# Altium PCB Carte_EV_2018.PcbDoc
Units mm, origin at the board's own origin, x right, y up, seen from the top; angles counter-clockwise.
Board outline 74 x 50 mm, 2 copper layers (Component Side, Bottom Layer), stack 1.731 mm thick; 66 components, 37 nets, 175 pads, 14 vias.
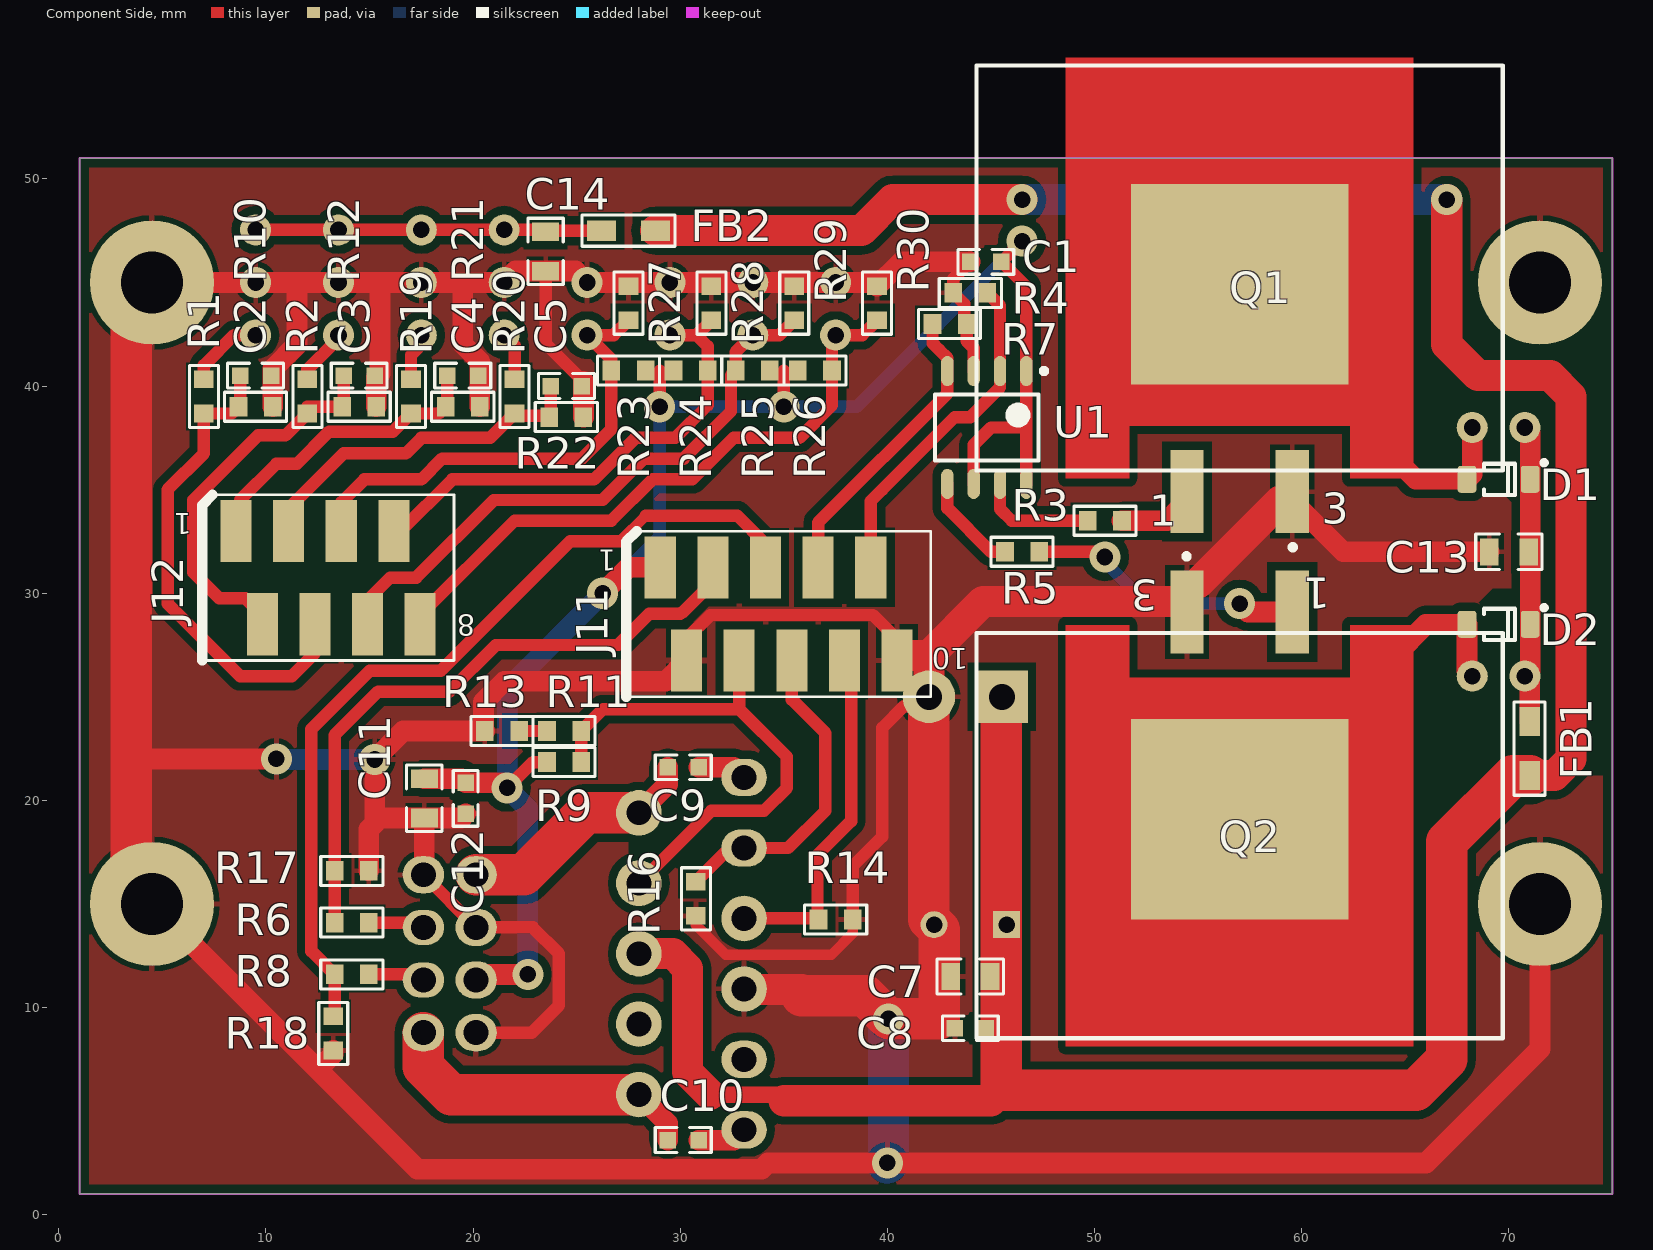
[diagram p0: Component Side view]
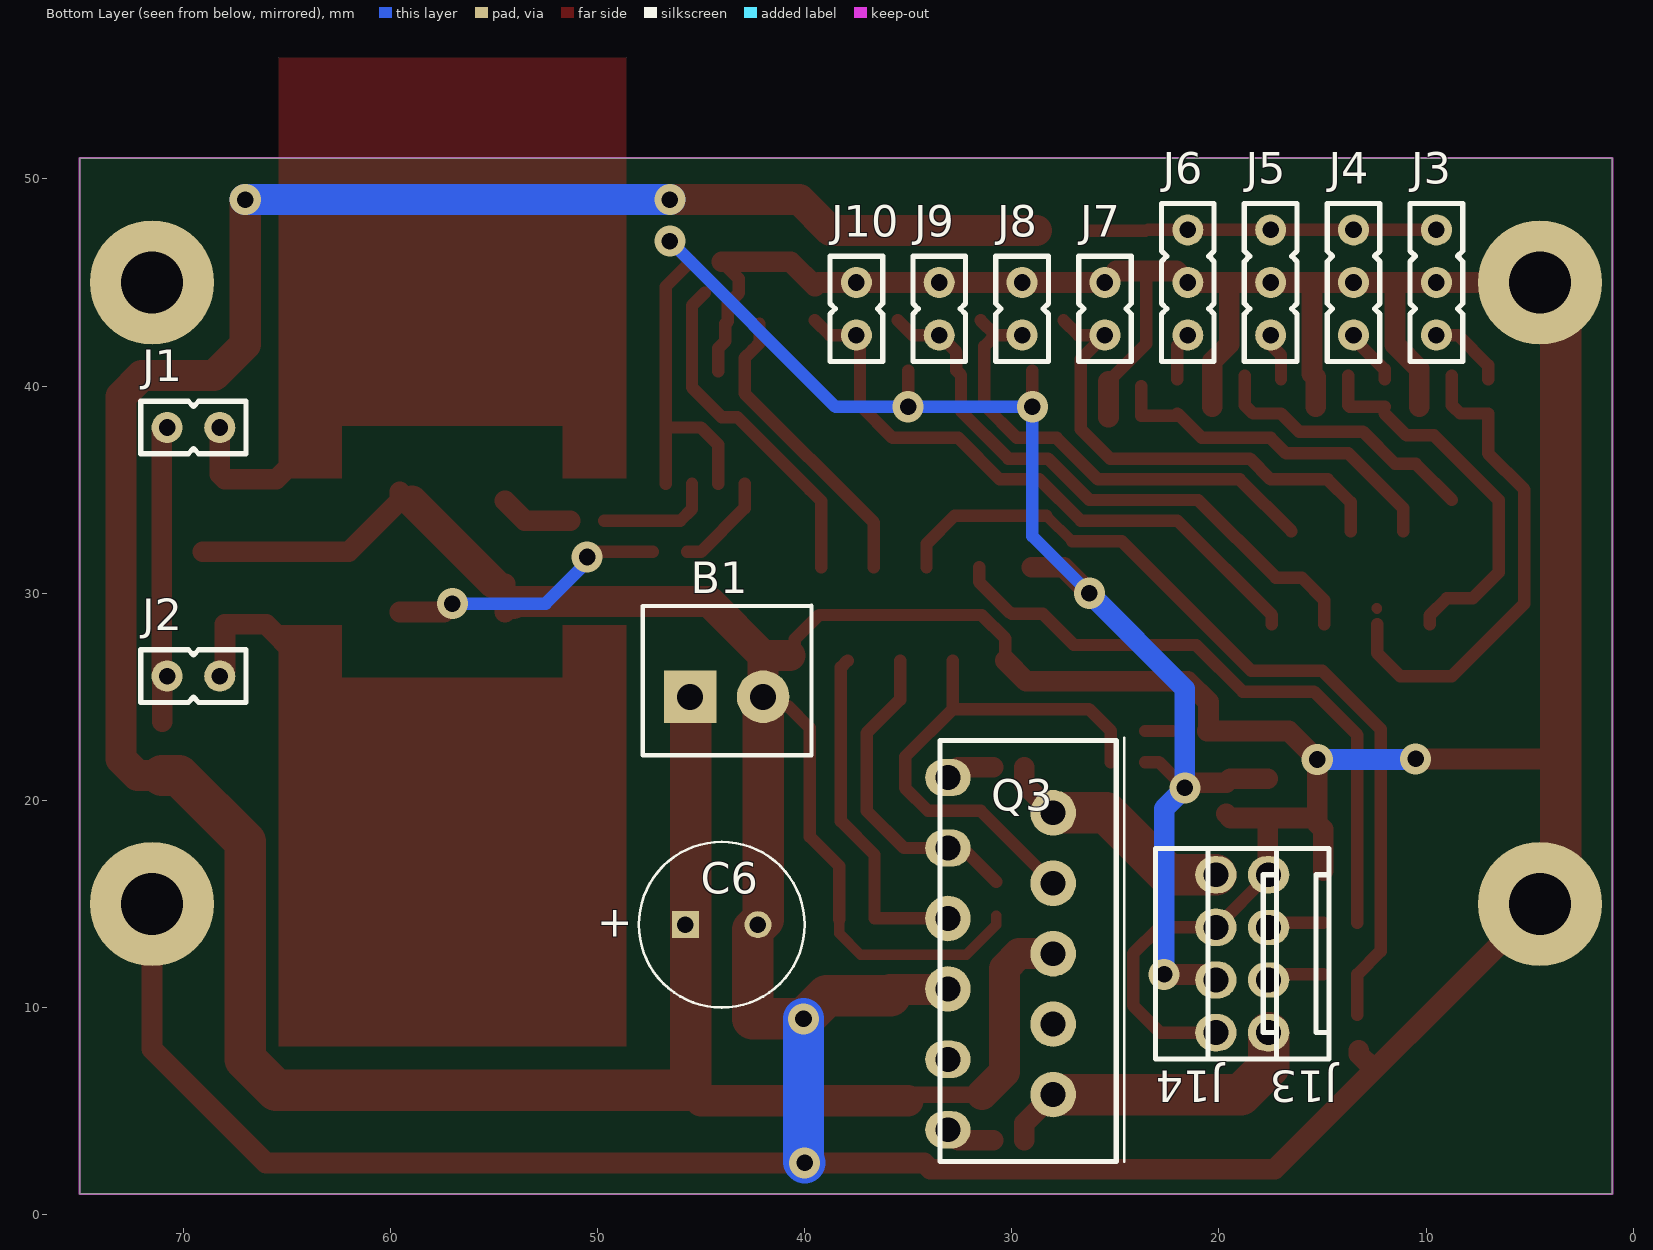
[diagram p1: Bottom Layer view, seen from below]
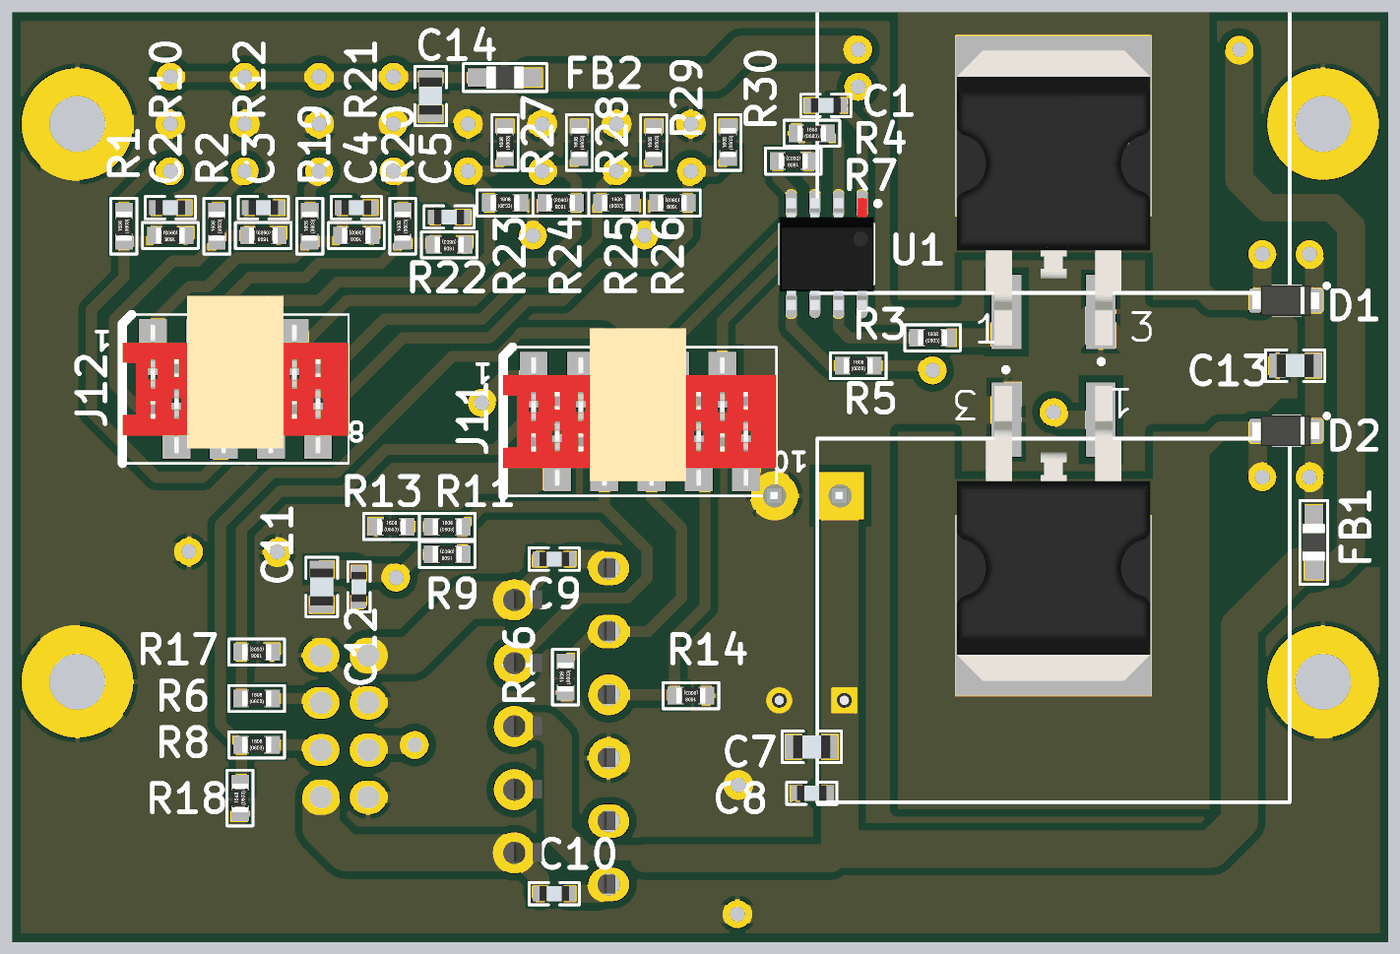
[diagram p2: 3D render of the assembled board from above, using the file's embedded part models]

## Layer stack, top to bottom
Top Solder: solder mask 0.0102, Solder Resist, Dk 3.5
Component Side: signal copper 0.0356
Dielectric 1: core 1.66, FR-4, Dk 4.2
Bottom Layer: signal copper 0.0356
Solder Side: solder mask 0.0102, Solder Resist, Dk 3.5

## Board outline
1,1 75,1 75,51 1,51

## Design rules (kind name [scope] priority, off if disabled: settings)
AssemblyTestPointUsage [All] p1 off:
AssemblyTestpoint [All] p1 off: testpointundercomponent=TRUE minsize=1.016 maxsize=2.54 preferedsize=1.524 minholesize=0 maxholesize=1.016 preferedholesize=0.813 testpointgrid=0.025 usegrid=TRUE gridtolerance=0 allowsidetop=TRUE allowsidebottom=TRUE
Clearance [All] p1: gap=0.4
ComponentClearance [All] p1: gap=0.2 collisioncheckmode=3 verticalgap=1 showdistances=FALSE
DiffPairsRouting [All] p1 off: maxlimit=0.254 minlimit=0.254 mostfreqgap=0.254 toplayer_minwidth=0.381 toplayer_maxwidth=0.381 toplayer_prefwidth=0.381 bottomlayer_minwidth=0.381 bottomlayer_maxwidth=0.381 bottomlayer_prefwidth=0.381 maxuncoupledlength=12.7
FabricationTestPointUsage TestPointUsage [All] p1 off: valid=0 allowmultiple=FALSE
FabricationTestpoint Testpoint [All] p1 off: side=3 testpointundercomponent=TRUE minsize=1.016 maxsize=2.54 preferedsize=1.524 minholesize=0 maxholesize=1.016 preferedholesize=0.813 testpointgrid=0.025 allowsidetop=TRUE allowsidebottom=TRUE usegrid=TRUE gridtolerance=0
FanoutControl Fanout_BGA [IsBGA] p1 off: bgadir=Out bgaviamode=Centered fanoutstyle=Auto fanoutdirection=Alternating viagrid=0.025 // Fanout_BGA (Default Rule)
FanoutControl Fanout_LCC [IsLCC] p2 off: bgadir=Out bgaviamode=Centered fanoutstyle=Auto fanoutdirection=Alternating viagrid=0.025 // Fanout_LCC (Default Rule)
FanoutControl Fanout_SOIC [IsSOIC] p3 off: bgadir=Out bgaviamode=Centered fanoutstyle=Auto fanoutdirection=Alternating viagrid=0.025 // Fanout_SOIC (Default Rule)
FanoutControl Fanout_Small [(CompPinCount < 5)] p4 off: bgadir=Out bgaviamode=Centered fanoutstyle=Auto fanoutdirection=OutThenIn viagrid=0.025 // Fanout_Small (Default Rule)
FanoutControl Fanout_Default [All] p5 off: bgadir=Out bgaviamode=Centered fanoutstyle=Auto fanoutdirection=Alternating viagrid=0.025 // Fanout_Default (Default Rule)
HoleSize [All] p1: absolutevalues=TRUE maxlimit=6 minlimit=0.15 maxpercent=80.000 minpercent=20.000
HoleToHoleClearance [All] p1: gap=0.6 allowstackedmicrovias=TRUE
MinimumSolderMaskSliver [All] p1: minsoldermaskwidth=0.075
MinimumSolderMaskSliver SilkscreenOverComponentPads [All] p2 off: minsoldermaskwidth=0.254
NetAntennae [All] p1 off: netantennaetolerance=0
PlaneClearance [All] p1: clearance=0.5
PlaneConnect [All] p1: planeconnectstyle=Relief reliefexpansion=0.4 reliefentries=4 reliefconductorwidth=0.3 reliefairgap=0.2
PolygonConnect [All] p1: connectstyle=Relief reliefconductorwidth=0.25 reliefentries=4 polygonreliefangle="90 Angle" airgapwidth=0.254
RoutingVias [All] p1: holewidth=0.8 width=1.5 viastyle="Through Hole" minholewidth=0.2 minwidth=0.6 maxholewidth=0.8 maxwidth=1.5
SilkToSilkClearance [All] p1 off: silktosilkclearance=0.1
SolderMaskExpansion [All] p1: expansion=0.05
Width [All] p1: maxlimit=3 minlimit=0.15 preferedwidth=0.6
12 further rules are at their usual default settings.

## Components (designator, comment, footprint, x,y, rotation, side; value= is the part's Value field where it differs from the comment)
B1 "1776275-2" BORNIER_2V_3.5MM 45.5,25 r180 bottom
C1 "100nF" "WCAP-CSGP_0603, 1.6x0.8x0.8" 44.75,46 r0 top
C2 "100nF" "WCAP-CSGP_0603, 1.6x0.8x0.8" 9.5,40.5 r180 top
C3 "100nF" "WCAP-CSGP_0603, 1.6x0.8x0.8" 14.5,40.5 r180 top
C4 "100nF" "WCAP-CSGP_0603, 1.6x0.8x0.8" 19.5,40.5 r180 top
C5 "100nF" "WCAP-CSGP_0603, 1.6x0.8x0.8" 24.5,40 r180 top
C6 "220 uF" WCAP-ATG8_8x11.5x3.5x0.5 44,14 r0 bottom
C7 "1uF" "WCAP-CSGP_0805, 2x1.25x1.25" 44,11.5 r0 top
C8 "100nF" "WCAP-CSGP_0603, 1.6x0.8x0.8" 44,9 r0 top
C9 "10nF" "WCAP-CSGP_0603, 1.6x0.8x0.8" 30.143,21.6 r180 top
C10 "10nF" "WCAP-CSGP_0603, 1.6x0.8x0.8" 30.143,3.6 r180 top
C11 "1uF" "WCAP-CSGP_0805, 2x1.25x1.25" 17.643,20.1 r90 top
C12 "100nF" "WCAP-CSGP_0603, 1.6x0.8x0.8" 19.643,20.1 r90 top
C13 "1uF" "WCAP-CSGP_0805, 2x1.25x1.25" 70,32 r0 top
C14 "1uF" "WCAP-CSGP_0805, 2x1.25x1.25" 23.5,46.5 r90 top
D1 "RBR3MM40ATFTR" SOD-123FL 69.5,35.5 r0 top
D2 "RBR3MM40ATFTR" SOD-123FL 69.5,28.5 r0 top
FB1 "742792023" "WE-CBF_0805_High Current" 71,22.5 r90 top
FB2 "742792023" "WE-CBF_0805_High Current" 27.5,47.5 r180 top
J1 "22-03-2021" 22-03-2021 69.5,38 r0 bottom
J2 "22-03-2021" 22-03-2021 69.5,26 r0 bottom
J3 "22-03-2031" 22-03-2031 9.5,45 r90 bottom
J4 "22-03-2031" 22-03-2031 13.5,45 r90 bottom
J5 "22-03-2031" 22-03-2031 17.5,45 r90 bottom
J6 "22-03-2031" 22-03-2031 21.5,45 r90 bottom
J7 "22-03-2021" 22-03-2021 25.5,43.73 r270 bottom
J8 "22-03-2021" 22-03-2021 29.5,43.73 r270 bottom
J9 "22-03-2021" 22-03-2021 33.5,43.73 r270 bottom
J10 "22-03-2021" 22-03-2021 37.5,43.73 r270 bottom
J11 "690367281076" 690367281076 34.75,29 r180 top
J12 "690367280876" 690367280876 13,30.75 r180 top
J13 "22-27-2041" 22-27-2041#1 17.603,12.6 r270 bottom
J14 "22-27-2041" 22-27-2041#2 20.143,12.6 r270 bottom
Q1 "IRF1018ESPBF" "D2Pak / AAVID 7109DG" 57,33 r0 top
Q2 "IRF1018ESPBF" "D2Pak / AAVID 7109DG" 57,31 r180 top
Q3 "LMD18200T" LMD18200T 29.143,12.6 r270 bottom
R1 "RC0603FR-07100KL" RESC1608X06N 7,39.5 r90 top
R2 "RC0603FR-07100KL" RESC1608X06N 12,39.5 r90 top
R3 "RC0603FR-0733RL" RESC1608X06N 50.5,33.5 r0 top
R4 "RC0603FR-07100KL" RESC1608X06N 44,44.5 r0 top
R5 "RC0603FR-0733RL" RESC1608X06N 46.5,32 r0 top
R6 "RC0603FR-0733RL" RESC1608X06N 14.143,14.1 r0 top
R7 "RC0603FR-07100KL" RESC1608X06N 43,43 r180 top
R8 "RC0603FR-0733RL" RESC1608X06N 14.143,11.6 r0 top
R9 "RC0603FR-0710KL" RESC1608X06N 24.393,21.85 r180 top
R10 "RC0603FR-0710KL" RESC1608X06N 9.5,39 r180 top
R11 "RC0603FR-0710KL" RESC1608X06N 24.393,23.35 r0 top
R12 "RC0603FR-0710KL" RESC1608X06N 14.5,39 r180 top
R13 "RC0603FR-0710KL" RESC1608X06N 21.393,23.35 r0 top
R14 "RC0603FR-07100KL" RESC1608X06N 37.5,14.25 r180 top
R16 "RC0603FR-0710KL" RESC1608X06N 30.75,15.25 r90 top
R17 "RC0603FR-0710KL" RESC1608X06N 14.143,16.6 r180 top
R18 "RC0603FR-0710KL" RESC1608X06N 13.25,8.75 r90 top
R19 "RC0603FR-07100KL" RESC1608X06N 17,39.5 r90 top
R20 "RC0603FR-07100KL" RESC1608X06N 22,39.5 r90 top
R21 "RC0603FR-0710KL" RESC1608X06N 19.5,39 r180 top
R22 "RC0603FR-0710KL" RESC1608X06N 24.5,38.5 r180 top
R23 "RC0603FR-0710KL" RESC1608X06N 27.5,40.75 r0 top
R24 "RC0603FR-0710KL" RESC1608X06N 30.5,40.75 r180 top
R25 "RC0603FR-0710KL" RESC1608X06N 33.5,40.75 r0 top
R26 "RC0603FR-0710KL" RESC1608X06N 36.5,40.75 r180 top
R27 "RC0603FR-0710KL" RESC1608X06N 27.5,44 r90 top
R28 "RC0603FR-0710KL" RESC1608X06N 31.5,44 r90 top
R29 "RC0603FR-0710KL" RESC1608X06N 35.5,44 r90 top
R30 "RC0603FR-0710KL" RESC1608X06N 39.5,44 r90 top
U1 "PM8834" SOIC127P600X175-8N 44.8,38 r270 top

## Footprints (in the part's own frame and the unit in brackets; to place one, negate y for a bottom-side part, rotate by r counter-clockwise, add the part's x,y. Pads: shape width x height; smd on the part's side, far side on the other; paste and mask are expansions set on the pad)
22-03-2021 [mm]
  round 1.5 hole 0.8: 1(1.27,0) 2(-1.27,0)
  silkscreen extent -2.54,-1.27 2.54,1.27, body extent -2.54,-1.27 2.54,1.27, height 11.6
22-03-2031 [mm]
  round 1.5 hole 0.8: 1(2.54,0) 2(0,0) 3(-2.54,0)
  silkscreen extent -3.81,-1.27 3.81,1.27, body extent -3.81,-1.27 3.81,1.27, height 11.6
22-27-2041#1 [mm]
  oval 1.8x2 hole 1.2: 1(3.81,0) 4(-3.81,0)
  oval 1.7x2 hole 1.2: 2(1.27,0) 3(-1.27,0)
  silkscreen extent -5.08,-2.92 5.08,2.92, body extent -5.08,-2.92 5.08,2.88, height 11.72
22-27-2041#2 [mm]
  oval 1.8x2 hole 1.2: 1(3.81,0) 2(1.27,0) 3(-1.27,0) 4(-3.81,0)
  silkscreen extent -5.08,-2.92 5.08,2.92, body extent -5.08,-2.92 5.08,2.88, height 11.72
690367280876 [mm] "8 pins, SMT, straight, without Latch"
  rect 1.5x3 smd: 1(4.445,-2.25) 2(3.175,2.25) 3(1.905,-2.25) 4(0.635,2.25) 5(-0.635,-2.25) 6(-1.905,2.25) 7(-3.175,-2.25) 8(-4.445,2.25)
  silkscreen extent -6.08,-4 6.08,4, body extent -6.08,-5 6.08,3.5, height 5.75
690367281076 [mm] "10 pins, SMT, straight, without Latch"
  rect 1.5x3 smd: 1(5.715,-2.25) 2(4.445,2.25) 3(3.175,-2.25) 4(1.905,2.25) 5(0.635,-2.25) 6(-0.635,2.25) 7(-1.905,-2.25) 8(-3.175,2.25) 9(-4.445,-2.25) 10(-5.715,2.25)
  silkscreen extent -7.35,-4 7.35,4, body extent -7.35,-5 7.35,3.5, height 5.7
BORNIER_2V_3.5MM [mm]
  rect 2.54x2.54 hole 1.25: 1(-0.025,0)
  round 2.54 hole 1.25: 2(3.5,0)
  silkscreen extent -2.31,-2.82 5.84,4.39, body extent -2.27,-5.08 5.83,5.32, height 21.81
"D2Pak / AAVID 7109DG" [mm] "D2-PAK; 3 Leads (1 Cropped); Body 15.2 (inc. leads) x 10.9 mm (LxW max)"
  rect 1.61x4 smd: 1(-2.54,1.905) 3(2.54,1.905)
  rect 10.49x9.68 smd: 2(0,11.905)
  Component Side region: -5.334,5.08 5.334,5.08 5.334,2.54 8.382,2.54 8.382,22.86 -8.382,22.86 -8.382,2.54 -5.334,2.54
  silkscreen extent -12.7,-1.34 12.7,22.48, body extent -12.7,0.1 12.7,22.48, height 11.43
LMD18200T [mm]
  oval 1.8x2.2 hole 1.2: 1(-8.5,-3.937) 3(-5.1,-3.937) 9(5.1,-3.937) 11(8.5,-3.937)
  round 2.2 hole 1.2: 2(-6.8,1.143) 4(-3.4,1.143) 5(-1.7,-3.937) 6(0,1.143) 7(1.7,-3.937) 8(3.4,1.143) 10(6.8,1.143)
  silkscreen extent -10.41,-4.32 10.03,4.57, body extent -10.33,-4.3 10.07,4.19, height 16.79
RESC1608X06N [mm] "Chip Resistor, 2-Leads, Body 1,6x0,8mm, IPC Medium Density"
  rect 0.85x0.95 smd: 1(-0.825,0) 2(0.825,0)
  silkscreen extent -1.5,-0.7 1.5,0.7, body extent -0.77,-0.42 0.78,0.43, height 0.45
SOD-123FL [mm] "SOD-123FL"
  rrect30% 0.9x1.3 smd: 1(-1.525,0) 2(1.525,0)
  silkscreen extent -0.7,-0.75 2.3,0.9, body extent -1.8,-0.83 1.8,0.82, height 0.95
SOIC127P600X175-8N [mm] "SOIC, 8-Leads, Body 4,90x3,90mm, Pitch 1,27mm, IPC Medium Density"
  oval 1.45x0.6 smd: 1(-2.725,1.905) 2(-2.725,0.635) 3(-2.725,-0.635) 4(-2.725,-1.905) 5(2.725,-1.905) 6(2.725,-0.635) 7(2.725,0.635) 8(2.725,1.905)
  silkscreen extent -2.85,-2.5 1.6,2.88, body extent -3,-2.54 3,2.54, height 1.7
WCAP-ATG8_8x11.5x3.5x0.5 [mm] "Polarized capacitors, Aluminum Electrolytic Capacitors, 2-Leads, Body 8x11.5x3.5x0.5"
  rect 1.3x1.3 hole 0.8: 1(1.75,0)
  round 1.3 hole 0.8: 2(-1.75,0)
  silkscreen extent -4,-4 4,4, body extent -3.99,-4 4,4, height 11.61
"WCAP-CSGP_0603, 1.6x0.8x0.8" [mm] "WCAP-CSGP Ceramic Capacitors, size 0603, body 1.6x0.8x0.8"
  rect 0.8x0.8 smd: 1(-0.75,0) 2(0.75,0)
  silkscreen extent -1.35,-0.6 1.35,0.6, body extent -0.8,-0.4 0.8,0.4, height 0.8
"WCAP-CSGP_0805, 2x1.25x1.25" [mm] "WCAP-CSGP Ceramic Capacitors, size 0805, body 2x1.25x1.25"
  rect 0.9x1.3 smd: 1(-0.95,0) 2(0.95,0)
  silkscreen extent -1.6,-0.85 1.6,0.85, body extent -1,-0.62 1,0.63, height 1.22
"WE-CBF_0805_High Current" [mm] "SMD EMI Suppression Ferrite  Bead, body 2.0mmx1.2mm"
  rect 1.4x1 smd: 1(-1.3,0) 2(1.3,0)
  silkscreen extent -2.25,-0.75 2.25,0.75, body extent -1,-0.6 1,0.6, height 0.93

## Part data
B1: "TERM BLOCK 2POS SIDE ENT 3.5MM"
C1 C2 C3 C4 C5 C8 C12: library part "WCAP-CSGP, 885012206095", "CAP CER 100nF 50V X7R 0603"
C6: library part "WCAP-ATG8, 860010574011", "CAP Alu 220 UF 20% 35 V"
C7 C11 C13 C14: library part "WCAP-CSGP, 885012207103", "CAP CER 1uF 50V X7R 0805"
C9 C10: library part "WCAP-CSGP, 885012206089", "CAP CER 10nF 50V X7R 0603"
D1 D2: "DIODE SCHOTTKY 40V 3A SOD123-FL"
FB1 FB2: library part "WE-CBF, 742792023", "Ferrite Bead 120ohm 0805 max3.0A"
J11: "WR-MM 10p Female SMT Connector with Polarization"
J12: "WR-MM 8p Female SMT Connector with Polarization"
Q1 Q2: "MOSFET N-CH 60V 79A D2PAK"
R1 R2 R4 R7 R14 R19 R20: "RES SMD 100K OHM 1% 1/10W 0603"
R3 R5 R6 R8: "RES SMD 33 OHM 1% 1/10W 0603"
R9 R10 R11 R12 R13 R16 R17 R18 R21 R22 R23 R24 R25 R26 R27 R28 R29 R30: "RES SMD 10K OHM 1% 1/10W 0603"
U1: "IC MOSFET DVR 4A DUAL 8SOIC"

## Free pads (board coordinates)
  round 6 hole 3: 0(4.5,15) 0(4.5,45) 0(71.5,15) 0(71.5,45)

## Via types
v1: diameter 1.5, hole 0.8, Component Side to Bottom Layer, 14 vias

## Nets (pads, with @x,y where several pads share a name; then routed paths per layer and width w, separated by ;. In a path a pad name is that pad's centre, name@x,y a point inside that pad or via, vN(x,y) a via of type N, cw(c..) or ccw(c..) an arc to the next point about the centre after c; other vN are vias at no path point)
5L: C1.2 C11.2 C12.2 J11.1 J14.2 R9.2 R23.2 R24.2 R25.2 R26.2 U1.1 U1.6 U1.8 | length 84.4
  Component Side w0.6: v1(21.643,20.6) 22.893,21.85 R9.2 ; v1(29,39) 29,40.75 ; v1(35,39) 35,40.75 ; U1.6 44.165,37.165 45,38 46.705,38 ; v1(46.5,47) C1.2 46.705,44.795 U1.1 46.705,38 ; U1.8 46.705,38
  Component Side w1: C11.2 19.443,21.05 C12.2 v1@21.393,20.85 ; J14.2@20.413,11.6 v1(22.643,11.6) ; v1(26.25,30) 27.5,31.25 J11.1
  Bottom Layer w0.6: v1(26.25,30) 29,32.75 v1(29,39) v1(35,39) 38.5,39 v1(46.5,47)
  Bottom Layer w1: v1(22.643,11.6) 22.643,19.6 v1(21.643,20.6) 21.643,25.393 v1(26.25,30)
ALIM_C: C14.2 FB2.2 J3.1 J4.1 J5.1 J6.1 | length 16.6
  Component Side w0.6: J3.1 J4.1 J5.1 J6.1 C14.2@23.41,47.54 ; C14.2@23.55,47.5 FB2.2
ALIM_EV: C13.2 D1.2 D2.2 FB1.2 J1.1 J2.1 | length 14.2
  Component Side w1: J2.1 71.025,26.255 D2.2 D1.2 71.025,37.745 J1.1 ; FB1.2 J2.1@71,25.77
GND: B1.2 C1.1 C2.1 C3.1 C4.1 C5.1 C6.2 C7.1 C8.1 C11.1 C12.1 C13.1 C14.1 J3.2 J4.2 J5.2 J6.2 J7.2 J8.2 J9.2 J10.2 J11.2 J11.10 J13.4 J14.1 J14.3 pad.0 Q1.3 Q2.3 Q3.7 R4.1 R7.1 R10.1 R12.1 R13.1 R14.1 R16.1 R17.1 R18.1 R21.1 R22.1 R27.2 R28.2 R29.2 R30.2 U1.3 | length 344.8
  Component Side w0.5: R16.1 30.75,14 32.2,12.55 37.3,12.55 38.325,13.575 R14.1
  Component Side w0.6: J13.4 J14.3 22.873,13.87 24.143,12.6 24.143,10.1 22.833,8.79 J14.1 ; C14.1 23.5,42.05 C5.1@25.325,40.225 ; J11.2 30.305,27.805 31.45,28.95 39.3,28.95 40.465,27.785 J11.10 ; R14.1 38.325,16.825 39.75,18.25 39.75,23.5 40.8,24.55 B1.2@41.505,24.55 ; C1.1 43.175,45.175 R4.1 43.7,43.975 43.7,43.125 R7.1 43.825,42.175 44.165,41.835 U1.3
  Component Side w1: 3.5,22 v1(10.5,22) ; pad.0@4.5,15 17.3,2.2 33.926,2.2 34.226,2.5 v1(40,2.5) 66,2.5 71.5,8 pad.0@71.5,15 ; pad.0@4.5,45 J3.2 J4.2 15.5,45 ; R10.1 10.325,40.825 11.5,42 11.5,45 ; 12.625,7.125 13.25,7.75 R18.1 ; R17.1 14.968,18.6 15.25,18.882 v1(15.25,21.975) 16.625,23.35 R13.1 20.5,23.418 20.5,24.75 21.5,25.75 29.305,25.75 J11.2 ; R12.1 15.325,40.425 15.5,40.6 15.5,45 ; 15.518,19.15 C11.1 ; J13.4@17.643,16.45 C11.1 ; C12.1 19.443,19.15 C11.1 ; R21.1 20.325,41.198 19.5,42.023 19.5,45 ; 24.95,45.55 C14.1 22.05,45.55 J6.2 19.5,45 ; R22.1 C5.1@25.325,40.225 ; J7.2 J8.2 J10.2 R30.2@39.325,45 ; R30.2 40.675,46 C1.1 ; Q2.3@54.055,29.5 Q2.3 54.46,30.46 Q2.3@54.96,30.46 ; Q1.3@58.96,34.46 Q1.3@59.54,34.46 ; Q1.3 Q1.3@59.54,34.46 ; C13.1 62,32 Q1.3@59.54,34.46 ; 15.5,45 J5.2 19.5,45
  Component Side w1.5: Q3.7 33.105,10.875 35.868,10.875 ; J11.10@40.715,27 42,27 ; B1.2@42,25.5 42,27 ; Q2.3@54.055,29.5 53.945,29.61 44.61,29.61 42,27 ; Q2.3@54.96,30.46 Q1.3@58.96,34.46
  Component Side w2: pad.0@3.5,16 3.5,22 3.5,44 pad.0@4.5,45 ; 35.868,10.575 38.925,10.575 v1(40.05,9.45) 42.5,9.45 42.5,13.75 C6.2 42,14.25 B1.2
  Bottom Layer w1: v1(10.5,22) 10.525,21.975 v1(15.25,21.975)
  Bottom Layer w2: v1(40,2.5) 40.05,2.55 v1(40.05,9.45)
LA1: C2.2 J12.4 R1.1 R10.2 | length 23.7
  Component Side w0.5: J12.4@12.365,29.25 J12.4@12.385,29.27
  Component Side w0.6: C2.2 8.75,39.075 R10.2 8.35,38.675 R1.1 7,36.75 5.25,35 5.25,29.5 8.75,26 11.25,26 12.365,27.115 J12.4
LA2: C3.2 J12.2 R2.1 R12.2 | length 18.5
  Component Side w0.6: J12.2 9.825,28.925 9,29.75 7.75,29.75 6.5,31 6.5,34.5 9.616,37.616 10.941,37.616 R2.1 ; R2.1@12,39 13.586,39 R12.2 13.75,39.075 C3.2
M1+: C10.2 J13.1 Q3.10 | length 15.4
  Component Side w1: Q3.10 29.393,4.407 C10.2
  Component Side w2: J13.1 17.603,7.14 18.943,5.8 Q3.10
M1-: C9.2 J14.4 Q3.2 | length 11.9
  Component Side w1: Q3.2 29.393,20.793 C9.2
  Component Side w2: J14.4 22.453,16.41 25.443,19.4 Q3.2
M1_BRK: J11.4 Q3.4 R9.1 R11.2 | length 25.7
  Component Side w0.6: R9.1 R11.2 26.273,24.405 32.845,24.405 ; Q3.4 31.5,19.5 34.043,19.5 35.143,20.6 35.143,22.107 32.845,24.405 ; J11.4 32.845,24.405
M1_CHA: J11.3 R6.1 R17.2 | length 31.1
  Component Side w0.6: R6.1 R17.2 13.318,23.154 15.414,25.25 18.849,25.25 21.099,27.5 27,27.5 28.5,29 30,29 30.05,29.05 30.075,29.05 31.575,30.55 J11.3
M1_CHB: J11.5 R8.1 R18.2 | length 42.2
  Component Side w0.5: 27.078,32.5 28.328,33.75
  Component Side w0.6: R18.2@13.318,9.643 R8.1 12.193,12.725 12.193,23.443 15,26.25 18.435,26.25 24.685,32.5 27.078,32.5 ; 28.328,33.75 32.75,33.75 34.115,32.385 J11.5
M1_DIR: J11.6 Q3.3 R16.2 | length 14.9
  Component Side w0.6: R16.2 Q3.3@32.375,17.7 ; Q3.3 35.2,17.7 37,19.5 37,23.25 35.385,24.865 J11.6
M1_PWM: J11.8 Q3.5 R14.2 | length 16.8
  Component Side w0.6: Q3.5 36.625,14.3 36.625,17.375 38.25,19 38.25,26.425 J11.8
NetC9_1: C9.1 Q3.1 | length 2.4
  Component Side w1: C9.1 32.58,21.6 Q3.1
NetC10_1: C10.1 Q3.11 | length 2.4
  Component Side w1: C10.1 32.58,3.6 Q3.11
NetJ3_3: J3.3 R1.2 | length 3.8
  Component Side w0.6: R1.2 7,41 8.46,42.46 J3.3
NetJ4_3: J4.3 R2.2 | length 2.8
  Component Side w0.6: R2.2 12,40.803 13.5,42.303 J4.3
NetJ5_3: J5.3 R19.2 | length 2.3
  Component Side w0.6: R19.2 17,41.5 17.5,42 J5.3
NetJ6_3: J6.3 R20.2 | length 2.3
  Component Side w0.6: J6.3 22,41.96 R20.2
NetJ13_2: J13.2 R8.2 | length 2.7
  Component Side w0.6: R8.2 17.333,11.6 J13.2
NetJ13_3: J13.3 R6.2 | length 2.7
  Component Side w0.6: R6.2 17.373,14.1 J13.3
NetQ1_1: Q1.1 R3.2 | length 3.5
  Component Side w1: R3.2 53.5,33.5 Q1.1@54.46,34.46
NetQ2_1: Q2.1 R5.2 | length 13.6
  Component Side w0.6: R5.2 50,32 50.25,31.75 v1(50.5,31.75)
  Component Side w1: v1(57,29.5) 57.405,29.095 Q2.1
  Bottom Layer w0.6: v1(50.5,31.75) 50.5,31.5 52.5,29.5 v1(57,29.5)
NetR3_1: R3.1 U1.7 | length 5.7
  Component Side w0.6: U1.7 45.435,34.065 46,33.5 R3.1
NetR5_1: R5.1 U1.5 | length 4.8
  Component Side w0.6: U1.5 42.895,34.105 45,32 R5.1
NetR11_1: R11.1 R13.2 | length 1.4
  Component Side w0.6: R13.2 R11.1
OUT1: D1.1 J1.2 Q1.2 | length 7.2
  Component Side w1: 64,37 65.5,35.5 D1.1 68.23,35.755 J1.2
OUT2: D2.1 J2.2 Q2.2 | length 6.3
  Component Side w1: 64.5,27 66,28.5 D2.1 J2.2@67.975,26.255
PWM1: J11.9 R4.2 U1.2 | length 16.5
  Component Side w0.6: J11.9 39.195,34.445 39.75,35 43.25,38.5 44,38.5 45.435,39.935 U1.2 45.435,43.89 R4.2
PWM2: J11.7 R7.2 U1.4 | length 14.6
  Component Side w0.6: J11.7 36.655,33.405 42.895,39.645 U1.4 42.895,41.355 42.5,41.75 42.175,42.075 R7.2
RL1: C4.2 J12.1 R19.1 R21.2 | length 13.3
  Component Side w0.6: 8.75,34.5 10.5,36.25 11.5,36.25 13.05,37.8 16.125,37.8 ; 16.15,37.825 R19.1 18.35,38.675 R21.2 18.75,39.075 C4.2
RL2: C5.2 J12.3 R20.1 R22.2 | length 17.1
  Component Side w0.6: J12.3 11.095,34.095 13.75,36.75 16.75,36.75 17.5,37.5 20.825,37.5 R20.1 22.1,38.575 23.75,38.575 C5.2
SW1: J7.1 J12.5 R23.1 R27.1 | length 23.2
  Component Side w0.6: J12.5 13.635,34.385 14.75,35.5 17.5,35.5 18.5,36.5 25.25,36.5 26.675,37.925 R23.1 26.675,41.285 J7.1 26.785,42.46 R27.1
SW2: J8.1 J12.7 R24.1 R28.1 | length 23.2
  Component Side w0.6: J12.7@16.5,33 19,35.5 25.836,35.5 27.836,37.5 28,37.5 29.75,37.5 31.325,39.075 R24.1 31.325,41.92 30.785,42.46 ; J8.1 30.785,42.46 ; R28.1 30.785,42.46
SW3: J9.1 J12.6 R25.1 R29.1 | length 28.9
  Component Side w0.6: J12.6 14.905,29.655 16,30.75 17.25,30.75 21,34.5 26.25,34.5 28.25,36.5 30.164,36.5 32.45,38.786 32.45,40.525 R25.1 32.675,41.635 J9.1 34.785,42.46 R29.1
SW4: J10.1 J12.8 R26.1 R30.1 | length 30.3
  Component Side w0.6: J12.8 17.445,28.945 22,33.5 26.664,33.5 28.664,35.5 30.578,35.5 32.578,37.5 35.75,37.5 37.325,39.075 R26.1 37.325,42.285 J10.1 38.785,42.46 R30.1
VBATT: B1.1 C6.1 C7.2 C8.2 FB1.1 FB2.1 Q3.6 | length 153
  Component Side w0.8: 31.443,5.8 34.943,5.8
  Component Side w1.5: Q3.6 29.643,12.6 30.35,11.893 30.35,6.893 31.443,5.8 ; FB2.1 38.75,47.5 40.25,49 v1(46.5,49) ; 35,5.5 45,5.5 45.5,6 ; v1(67,49) 67,42 68.5,40.5 72,40.5 73,39.5 73,22 72.2,21.2 FB1.1
  Component Side w2: B1.1@45.5,25 45.5,6 65.5,6 67,7.5 67,18 70.2,21.2 FB1.1
  Bottom Layer w1.5: v1(46.5,49) v1(67,49)
pads on no net: Q3.8 Q3.9

## Polygon pours and split planes (outlines as drawn)
GND on Component Side "Component Side-No Net 1" (solid, remove dead copper, pour order 2): 1,1 75,1 75,51 1,51

## Keep-outs
Keep-Out Layer:
  the board outline again, w0.1

## Other copper
Component Side:
  pour cut-out: 14,26.75 13.25,26.75 13.25,27.5
  pour cut-out: 24.5,39.008 24.75,38.758 24.75,38
  pour cut-out: 73.82,21.18 74.68,21.18 74.75,21.25 74.25,21.75 73.75,21.75
  pour cut-out: 68.499,29.519 69.23,30.25 70.25,30.25 70.25,29.75 70.5,29.5
  pour cut-out: 68.5,34.75 69.75,34.75 70.25,34.25 70.25,35.25
  pour cut-out: 32.25,28.5 38.75,28.5 38.75,28 38.25,27.5
  pour cut-out: 32.25,30 33,30 33.5,29.5 32.25,29.5
  pour cut-out: 37.5,30 37.5,29.5 38.25,29.5
  pour cut-out: 31.25,15.75 31.25,14.946 31.602,14.594
  pour cut-out: 27.488,17.988 27.5,17.976 27.5,17

## Text inside footprints (layer, text, board x,y; h text height)
C6: Bottom Overlay "+" at 48.3,14.7 h1.5 r180
J11: Top Overlay "10" at 43.894,27.349 h1 r180; Top Overlay "1" at 26.9,32.1 h1 r180
J12: Top Overlay "8" at 20.112,28.972 h1 r180; Top Overlay "1" at 6.42,33.85 h1 r180
Q1: Top Overlay "3" at 60.962,33.356 h1.5; Top Overlay "1" at 52.631,33.254 h1.5
Q2: Top Overlay "3" at 53.038,30.644 h1.5 r180; Top Overlay "1" at 61.369,30.746 h1.5 r180